# Altium PCB Button3x4S-2_Pcb.PcbDoc
Units mil, origin at the board's own origin, x right, y up, seen from the top; angles counter-clockwise.
Board outline 400 x 400 mil, 2 copper layers (Top Layer, Bottom Layer); 12 components, 4 nets, 20 pads, 5 vias.
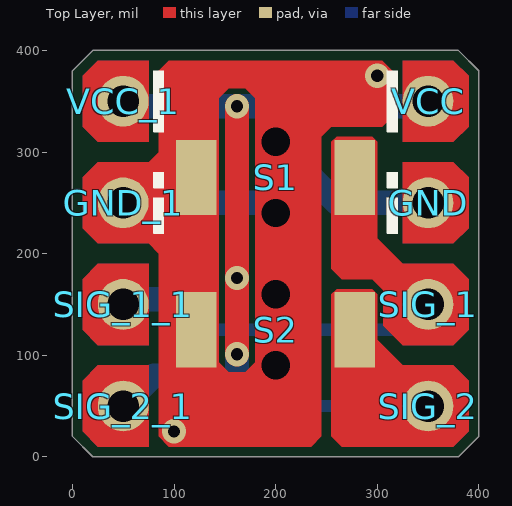
[diagram p0: Top Layer view]
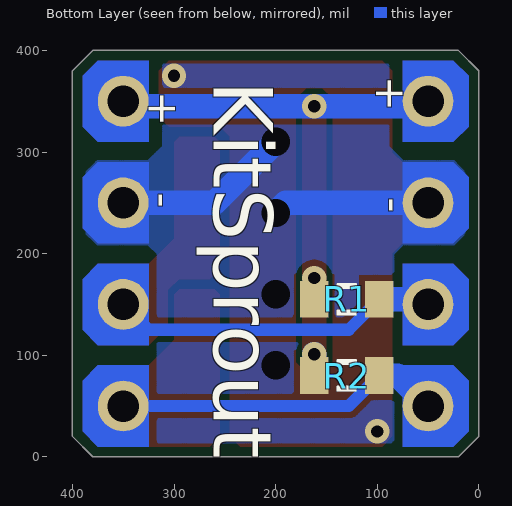
[diagram p1: Bottom Layer view, seen from below]

## Layer stack, top to bottom
Top Solder: solder mask 0.4, Solder Resist, Dk 3.5
Top Layer: signal copper 1.4
Dielectric1: dielectric 12.6, FR-4, Dk 4.8
Bottom Layer: signal copper 1.4
Bottom Solder: solder mask 0.4, Solder Resist, Dk 3.5

## Board outline
0,20 20,0 380,0 400,20 400,380 380,400 20,400 0,380

## Design rules (kind name [scope] priority, off if disabled: settings)
Clearance ClearancePolygon [InPolygon] p1: gap=6
Clearance [All] p2: gap=6
ComponentClearance [All] p1: gap=0 collisioncheckmode=3 verticalgap=0 showdistances=FALSE
Height [All] p1: minheight=0 maxheight=5000 prefheight=500
HoleToHoleClearance [All] p1: gap=6 allowstackedmicrovias=TRUE
MinimumSolderMaskSliver [All] p1: minsoldermaskwidth=6
PlaneConnect [All] p1: planeconnectstyle=Direct reliefexpansion=20 reliefentries=4 reliefconductorwidth=20 reliefairgap=10
PolygonConnect [All] p1: connectstyle=Direct reliefconductorwidth=20 reliefentries=4 polygonreliefangle="90 Angle" airgapwidth=10
RoutingVias [All] p1: holewidth=12 width=20 viastyle="Through Hole" minholewidth=12 minwidth=20 maxholewidth=100 maxwidth=200
SilkToSilkClearance [All] p1: silktosilkclearance=0
SilkToSolderMaskClearance SilkscreenOverComponentPads [IsPad] p1: minsilkscreentomaskgap=1 clearancetoexposedcopper=TRUE
SolderMaskExpansion [All] p1: expansion=0
Width [All] p1: maxlimit=30 minlimit=6 preferedwidth=10
22 further rules are at their usual default settings.

## Classes and differential pairs
component class Button3x4S-2_Sch: GND R1 R2 S1 S2 SIG_1 SIG_2 VCC

## Components (designator, comment, footprint, x,y, rotation, side; value= is the part's Value field where it differs from the comment)
GND "HDR-PAD_2.54" HDR-PAD_2.54 350,250 r0 top
GND_1 "HDR-PAD_2.54" HDR-PAD_2.54 50,250 r0 top (schematic designator GND)
R1 "Res_0603" RES_0603 130,155 r0 bottom
R2 "Res_0603" RES_0603 130,80 r0 bottom
S1 "ButtonTACT_3x4x2_180" ButtonTACT_3x4x2_180H 200,275 r0 top locked
S2 "ButtonTACT_3x4x2_180" ButtonTACT_3x4x2_180H 200,125 r0 top locked
SIG_1 "HDR-PAD_2.54" HDR-PAD_2.54 350,150 r90 top
SIG_1_1 "HDR-PAD_2.54" HDR-PAD_2.54 50,150 r90 top (schematic designator SIG_1)
SIG_2 "HDR-PAD_2.54" HDR-PAD_2.54 350,50 r90 top
SIG_2_1 "HDR-PAD_2.54" HDR-PAD_2.54 50,50 r90 top (schematic designator SIG_2)
VCC "HDR-PAD_2.54" HDR-PAD_2.54 350,350 r0 top
VCC_1 "HDR-PAD_2.54" HDR-PAD_2.54 50,350 r0 top (schematic designator VCC)

## Footprints (in the part's own frame and the unit in brackets; to place one, negate y for a bottom-side part, rotate by r counter-clockwise, add the part's x,y. Pads: shape width x height; smd on the part's side, far side on the other; paste and mask are expansions set on the pad)
ButtonTACT_3x4x2_180H [mil]
  round 0 hole 28: 0(0,-35) 0(0,35)
  rect 40x74 smd: 1(-78,0) 2(78,0)
  body extent -79,-49 79,49, height 63
HDR-PAD_2.54 [mil]
  round 50 hole 31: 1(0,0)
RES_0603 [mil]
  rect 28x36 smd: 1(-32,0) 2(32,0)
  silkscreen extent -10,-16 10,16, body extent -31,-16 32,16, height 20

## Part data
GND GND_1 SIG_1 SIG_1_1 SIG_2 SIG_2_1 VCC VCC_1: "Header"
R1 R2: "Resistor"
S1 S2: "Button"

## Via types
v1: diameter 24, hole 12, Top Layer to Bottom Layer, 5 vias

## Nets (pads, with @x,y where several pads share a name; then routed paths per layer and width w, separated by ;. In a path a pad name is that pad's centre, name@x,y a point inside that pad or via, vN(x,y) a via of type N, cw(c..) or ccw(c..) an arc to the next point about the centre after c; other vN are vias at no path point)
GND: GND.1 GND_1.1 S1.0 S1.1 S2.0 S2.1 | length 549
  Top Layer w24: 200,90 200,160 200,240 200,310
  Bottom Layer w24: GND_1.1 190,250 200,240 ; 200,310 260,250 GND.1
  other v1: 100,25 300,375
SIG_1: R1.1 S1.2 SIG_1.1 SIG_1_1.1 | length 317.8
  Bottom Layer w12: R1.1 128,125 325,125 SIG_1.1
  Bottom Layer w24: SIG_1_1.1@55,155 R1.1
SIG_2: R2.1 S2.2 SIG_2.1 SIG_2_1.1 | length 324.9
  Bottom Layer w12: R2.1 128,50 SIG_2.1
  Bottom Layer w24: SIG_2_1.1 80,80 R2.1
VCC: R1.2 R2.2 VCC.1 VCC_1.1 | length 565
  Top Layer w24: v1(162,101) v1(162,176) v1(162,345)
  Bottom Layer w24: VCC_1.1@50,345 VCC.1@350,345 ; R2.2 v1(162,101)

## Polygon pours and split planes (outlines as drawn)
GND on Bottom Layer "Mechanical 1-No Net" (hatched 90Degree grid 2 track 4, remove dead copper, pour order 3): 25,385 15,375 15,365 15,55 15,25 25,15 75,15 375,15 385,25 385,50 385,375 375,385

## Other copper
Top Layer:
  region net SIG_1: 300,310 295,315 260,315 255,310 255,185 265,175 295,175 306,164 306,129 325,110 375,110 390,125 390,175 375,190 325,190 300,215
  region net SIG_2: 260,165 255,160 255,20 265,10 375,10 390,25 390,75 375,90 325,90 300,115 300,160 295,165
  region net GND: 25,290 75,290 85,300 85,380 95,390 305,390 315,380 315,335 305,325 255,325 245,315 245,20 235,10 95,10 85,20 85,200 75,210 25,210 10,225 10,250 144,250 144,93 154,83 170,83 180,93 180,353 170,363 154,363 144,353 144,250 10,250 10,275
Bottom Layer:
  pour cut-out: 85,10 25,10 10,25 10,225 24.93,210 75,210 85,200
  pour cut-out: 25,390 90,390 90,305 75,290 25,290 10,275 10,375
  pour cut-out: 310,390 375,390 390,375 390,275 375.07,290 325,290 310,305
  pour cut-out: 390,25 375,10 315,10 315,200 325,210 375,210 390,225
Multi-Layer:
  region net SIG_2: 325,10 375,10 390,25 390,75 375,90 325,90
  region net VCC: 325,310 375,310 390,325 390,375 375,390 325,390
  region net GND: 325,210 375,210 390,225 390,275 375,290 325,290
  region net SIG_2: 75,90 25,90 10,75 10,25 25,10 75,10
  region net SIG_1: 75,190 25,190 10,175 10,125 25,110 75,110
  region net VCC: 75,390 25,390 10,375 10,325 25,310 75,310
  region net GND: 75,290 25,290 10,275 10,225 25,210 75,210
  region net SIG_1: 325,110 375,110 390,125 390,175 375,190 325,190

## Silkscreen, mask and mechanical layers (free items; w line width, h text height)
Top Overlay:
  region: 80,380 90,380 90,320 80,320
  region: 80,255 90,255 90,220 80,220
  region: 80,280 90,280 90,265 80,265
  region: 320,320 310,320 310,380 320,380
  region: 310,255 320,255 320,220 310,220
  region: 310,280 320,280 320,265 310,265
  lines w1: 80,220 80,255 90,255 90,220 80,220 ; 80,265 90,265 90,280 80,280 80,265 ; 80,320 90,320 90,380 80,380 80,320 ; 310,220 310,255 320,255 320,220 310,220 ; 310,265 320,265 320,280 310,280 310,265 ; 310,320 320,320 320,380 310,380 310,320
Bottom Overlay:
  text "KitSprout" at 280,370 h100 r90
  text "+" at 325,360 h30 r90
  text "+" at 75,340 h30 r270
  text "-" at 325,260 h30 r90
  text "-" at 75,240 h30 r270
Top Solder:
  region: 325,10 375,10 390,25 390,75 375,90 325,90
  region: 325,310 375,310 390,325 390,375 375,390 325,390
  region: 325,210 375,210 390,225 390,275 375,290 325,290
  region: 75,90 25,90 10,75 10,25 25,10 75,10
  region: 75,190 25,190 10,175 10,125 25,110 75,110
  region: 75,390 25,390 10,375 10,325 25,310 75,310
  region: 75,290 25,290 10,275 10,225 25,210 75,210
  region: 325,110 375,110 390,125 390,175 375,190 325,190
Bottom Solder:
  region: 325,10 375,10 390,25 390,75 375,90 325,90
  region: 325,310 375,310 390,325 390,375 375,390 325,390
  region: 325,210 375,210 390,225 390,275 375,290 325,290
  region: 75,90 25,90 10,75 10,25 25,10 75,10
  region: 75,190 25,190 10,175 10,125 25,110 75,110
  region: 75,390 25,390 10,375 10,325 25,310 75,310
  region: 75,290 25,290 10,275 10,225 25,210 75,210
  region: 325,110 375,110 390,125 390,175 375,190 325,190
Mechanical 1:
  the board outline again, w2

## Dimensions
380,400 to 380,0 on Mechanical 13
0,380 to 400,380 on Mechanical 13